# Altium PCB kijek3.PcbDoc
Units mm, origin at the board's own origin, x right, y up, seen from the top; angles counter-clockwise.
Board outline 85 x 21 mm, 2 copper layers (Top Layer, Bottom Layer); 73 components, 60 nets, 285 pads, 82 vias.
Unrouted connection lines stored in the file: 1.
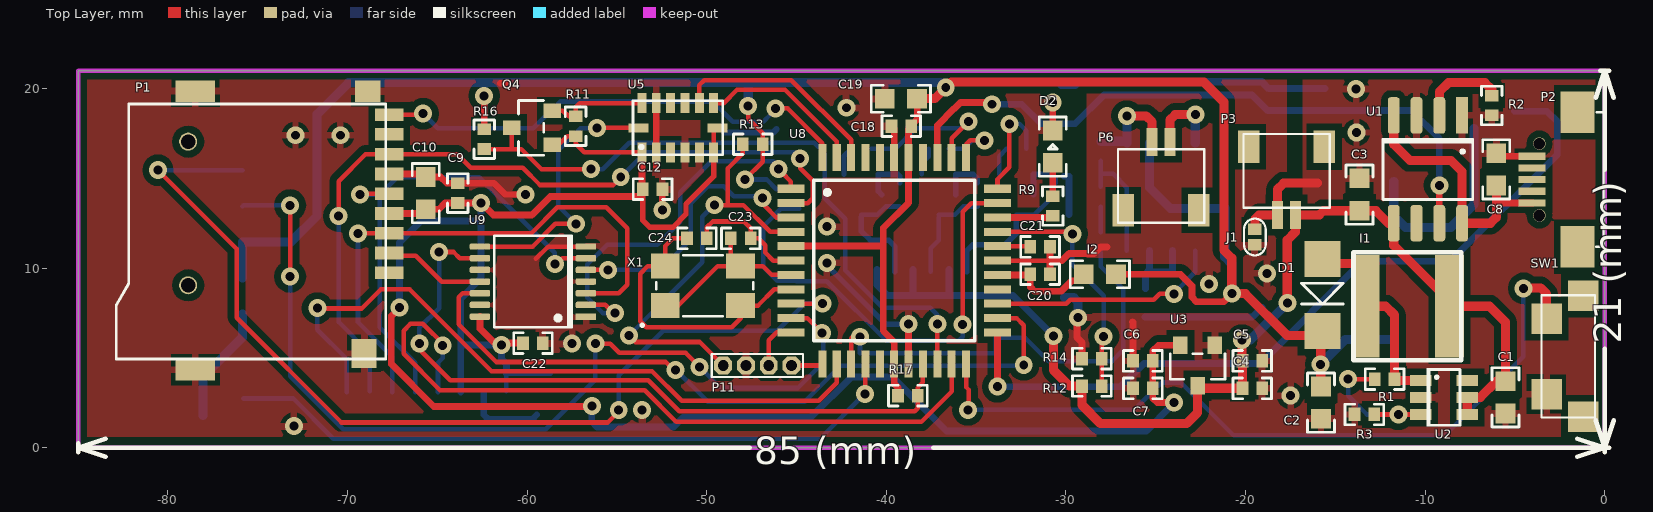
[diagram p0: Top Layer view]
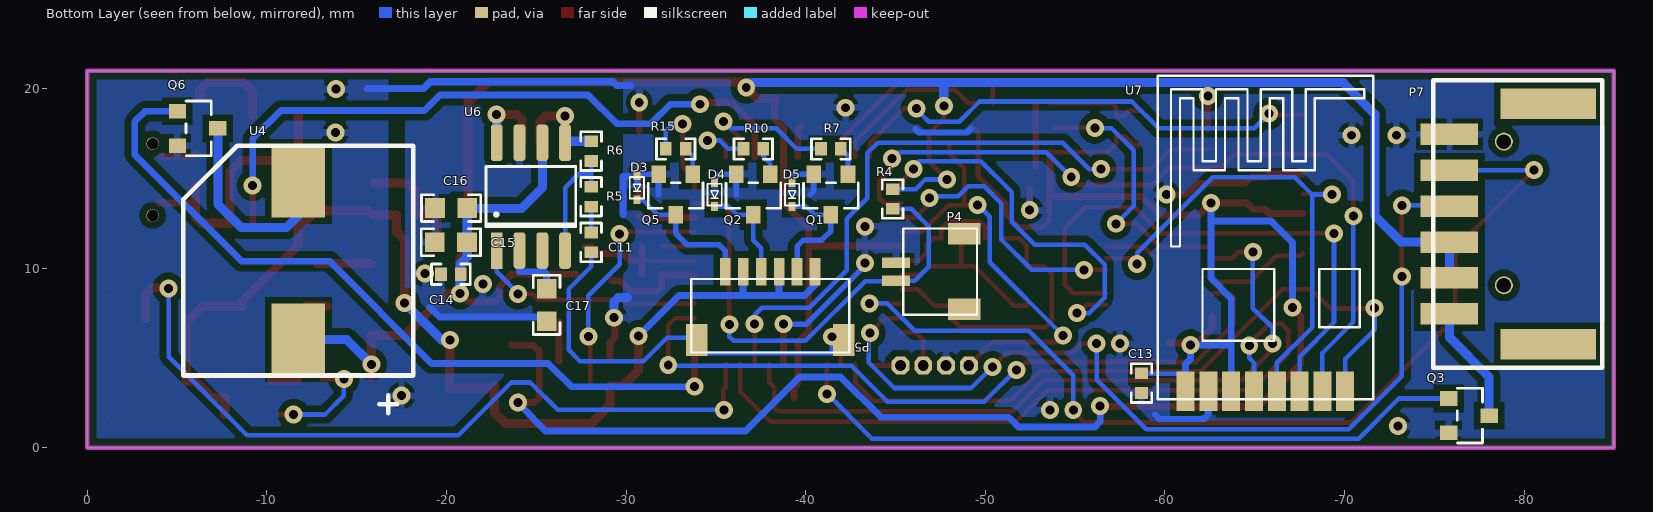
[diagram p1: Bottom Layer view, seen from below]

## Layer stack, top to bottom
Top Layer: signal copper 0.0356
Dielectric: dielectric 0.32, FR-4, Dk 4.8
Bottom Layer: signal copper 0.0356

## Board outline
-85,0 -85,21 0,21 0,0

## Design rules (kind name [scope] priority, off if disabled: settings)
Clearance [All] p1: gap=0.254
MinimumSolderMaskSliver [All] p1: minsoldermaskwidth=0.025
PlaneConnect [All] p1: planeconnectstyle=Relief reliefexpansion=0.508 reliefentries=4 reliefconductorwidth=0.381 reliefairgap=0.254
PolygonConnect [All] p1: connectstyle=Relief reliefconductorwidth=0.381 reliefentries=4 polygonreliefangle="90 Angle" airgapwidth=0.254
RoutingVias [All] p1: holewidth=0.5 width=1 viastyle="Through Hole" minholewidth=0.5 minwidth=1 maxholewidth=0.711 maxwidth=1.27
SolderMaskExpansion [All] p1: expansion=0.127
Width [All] p1: maxlimit=0.508 minlimit=0.254 preferedwidth=0.254
26 further rules are at their usual default settings.

## Components (designator, comment, footprint, x,y, rotation, side; value= is the part's Value field where it differs from the comment)
C1 "22uF" C0603 -5.526,2.802 r270 top
C2 "22uF" C0603 -15.799,2.515 r270 top
C3 "4,7uF" C0603 -13.654,14.1 r90 top
C4 "1uF" C0402 -19.623,3.31 r0 top
C5 "100nF" C0402 -19.623,4.834 r0 top
C6 "100nF" C0402 -25.719,4.834 r180 top
C7 "1uF" C0402 -25.719,3.31 r180 top
C8 "4,7uF" C0603 -6.034,15.502 r90 top
C9 "100nF" C0402 -63.866,14.178 r90 top
C10 "10uF" C0603 -65.644,14.178 r90 top
C11 "470nF" C0402 -28.056,11.438 r90 bottom
C12 "100nF" C0402 -53.01,14.402 r0 top
C13 "100nF" C0402 -58.7,3.6 r270 bottom
C14 "100nF" C0402 -20.247,9.66 r0 bottom
C15 "10uF" C0603 -20.247,11.438 r0 bottom
C16 "10uF" C0603 -20.258,13.343 r0 bottom
C17 "4,7uF" C0603 -25.578,7.95 r270 bottom
C18 "100nF" C0402 -39.167,17.907 r180 top
C19 "4,7uF" C0603 -39.192,19.431 r180 top
C20 "100nF" C0402 -31.434,9.66 r180 top
C21 "100nF" C0402 -31.434,11.184 r0 top
C22 "100nF" C0402 -59.677,5.824 r0 top
C23 "22pF" C0402 -48.108,11.659 r180 top
C24 "22pF" C0402 -50.546,11.659 r0 top
D1 "SS34" SMA -15.723,8.509 r90 top
D2 "BLUE" LED0603 -30.734,16.764 r270 top
D3 "RB521S30T1G" SOD523 -30.607,14.478 r90 bottom
D4 "RB521S30T1G" SOD523 -34.925,14.097 r90 bottom
D5 "RB521S30T1G" SOD523 -39.243,14.097 r90 bottom
I1 "22uH" 6x6x2.8mm -10.987,7.882 r180 top
I2 "10uH" I0603 -28.107,9.66 r180 top
J1 "SOLDER_JUMPER" SOLDER_JUMPER -19.482,11.735 r270 top
P1 "MICROSD" MICROSD -67.676,8.644 r0 top
P2 "USB" MICRO_USB_2 -1.513,11.184 r90 top
P3 "A1001WR-S-2P" A1001WR-S-2P -17.718,14.867 r180 top
P4 "LIGHT" A1001WR-S-2P -46.939,9.804 r90 bottom
P5 "MOTORS" A1001WR-S-6P -38.024,7.899 r180 bottom
P6 "A1001WR-S-2P" A1001WR-S-2P -24.703,15.121 r0 top
P7 "CON" MX-502352-0600 -78.598,12.454 r90 bottom
P11 "DEBUG" PAD_4-1 -47.182,4.58 r0 top
Q1 "BC847B" SOT23 -41.402,14.097 r0 bottom
Q2 "BC847B" SOT23 -37.084,14.097 r0 bottom
Q3 "2N7002" SOT23 -76.93,1.786 r270 bottom
Q4 "2N7002" SOT23 -59.723,17.815 r90 top
Q5 "BC847B" SOT23 -32.766,14.097 r0 bottom
Q6 "2N7002" SOT23 -6.147,17.78 r270 bottom
R1 "1M1" R0402 -12.257,3.818 r180 top
R2 "1K2" R0402 -6.288,19.058 r90 top
R3 "150K" R0402 -13.386,1.854 r180 top
R4 "4K7" R0402 -44.845,13.851 r90 bottom
R5 "20K" R0402 -28.056,13.978 r90 bottom
R6 "20K" R0402 -28.056,16.518 r90 bottom
R7 "10K" R0402 -41.402,16.637 r0 bottom
R9 "1K2" R0402 -30.734,13.462 r270 top
R10 "10K" R0402 -37.084,16.637 r0 bottom
R11 "4K7" R0402 -57.3,17.9 r90 top
R12 "1M1" R0402 -28.555,3.437 r180 top
R13 "4K7" R0402 -47.436,16.899 r180 top
R14 "1M1" R0402 -28.555,4.961 r180 top
R15 "10K" R0402 -32.766,16.637 r0 bottom
R16 "4K7" R0402 -62.39,17.18 r270 top
R17 "4K7" R0402 -38.8,2.9 r0 top
SW1 "SW_3x6x3.5mm" 3x6x3.5mm -2.224,5.088 r270 top
U1 "TP4056" SO-8 -9.844,15.502 r270 top
U2 "MT3608" SOT-23-6 -8.955,2.802 r270 top
U3 "XC6206" SOT23 -22.671,4.58 r180 top
U4 "SMB07" SMB07 -11.749,10.422 r90 bottom
U5 "ADXL345" LGA_CC-14 -51.611,17.815 r90 top
U6 "LM4871" SO-8 -24.703,13.978 r90 bottom
U7 "NRF24L01" NRF24L01 -65.597,3.158 r90 bottom
U8 "ATmega644" TQFP-44A -39.562,10.422 r0 top
U9 "74LCV125" TSSOP-14 -59.677,9.253 r180 top
X1 "18,432MHz" CFPX-104 -50.216,9.017 r0 top

## Footprints (in the part's own frame and the unit in brackets; to place one, negate y for a bottom-side part, rotate by r counter-clockwise, add the part's x,y. Pads: shape width x height; smd on the part's side, far side on the other; paste and mask are expansions set on the pad)
3x6x3.5mm [mm]
  rect 1.7x1.7 smd: 1(-2.1,-1.016) 2(2.1,-1.016) 3(3.37,1.016) 4(-3.37,1.016)
  Top Layer lines w0.127: 3.4,1.016 3.37,1.016 ; -3.37,1.016 -3.4,1.016
  silkscreen extent -3.4,-1.3 3.4,1.68, body extent -3.9,-1.1 3.9,2.5, height 3.5
6x6x2.8mm [mm]
  rect 1.6x5.7 smd: 1(-2.35,0) 2(2.35,0)
  silkscreen extent -3,-3 3,3, body extent -3,-3 3,3, height 2.8
A1001WR-S-2P [mm]
  rect 0.6x1.55 smd: 1(-0.5,1.9) 2(0.5,1.9)
  rect 1.2x1.8 smd: 3(-2.1,-1.9) 3(2.1,-1.9)
  silkscreen extent -2.4,-2.6 2.4,1.5, body extent -2.46,-2.66 2.46,1.56, height 2.9
A1001WR-S-6P [mm]
  rect 1.2x1.8 smd: 0(-4.1,-1.9) 0(4.1,-1.9)
  rect 0.6x1.55 smd: 1(-2.5,1.9) 2(-1.5,1.9) 3(-0.5,1.9) 4(0.5,1.9) 5(1.5,1.9) 6(2.5,1.9)
  silkscreen extent -4.4,-2.6 4.4,1.5, body extent -4.46,-2.66 4.4,1.56, height 2.9
C0402 [mm] "Chip Resistor, Body 1.0x0.5mm, IPC Low Density"
  rect 0.65x0.75 smd: 1(-0.55,0) 2(0.55,0)
  silkscreen extent -1.07,-0.58 1.07,0.58, body extent -0.52,-0.28 0.53,0.28, height 0.4
C0603 [mm] "Chip Resistor, Body 1.6x0.8mm, IPC Low Density"
  rect 1.1x1.1 smd: 1(-0.9,0) 2(0.9,0)
  silkscreen extent -1.65,-0.75 1.65,0.75, body extent -0.85,-0.47 0.85,0.47, height 0.6
CFPX-104 [mm]
  rect 1.6x1.4 smd: 1(-2.1,-1.1) 1(2.1,1.1) 2(-2.1,1.1) 2(2.1,-1.1)
  silkscreen extent -3.45,-2.28 2.8,1.7, body extent -2.5,-1.6 2.5,1.6, height 1
I0603 [mm] "Chip Resistor, Body 1.6x0.8mm, IPC Low Density"
  rect 1.1x1.1 smd: 1(-0.9,0) 2(0.9,0)
  silkscreen extent -1.65,-0.75 1.65,0.75, body extent -0.85,-0.47 0.85,0.47, height 0.6
LED0603 [mm] "Chip Diode Led, Body 1.6x0.8mm, IPC Low Density"
  rect 1.1x1.1 smd: 1(-0.9,0) 2(0.9,0)
  silkscreen extent -1.65,-0.75 1.65,0.75, body extent -0.85,-0.47 0.85,0.47, height 0.6
LGA_CC-14 [mm]
  rect 1.118x0.5 smd mask+0.025: 1(-1.371,2) 2(-1.371,1.2) 3(-1.371,0.4) 4(-1.371,-0.4) 5(-1.371,-1.2) 6(-1.371,-2) 8(1.371,-2) 9(1.371,-1.2) 10(1.371,-0.4) 11(1.371,0.4) 12(1.371,1.2) 13(1.371,2)
  rect 0.5x1.118 smd mask+0.025: 7(0,-2.2) 14(0,2.2)
  silkscreen extent -1.5,-2.5 1.5,2.5, body extent -1.58,-2.58 1.58,2.58, height 1
MICRO_USB_2 [mm]
  rect 2.3x1.9 smd: 0(0,0) 0(7.5,0)
  rect 0.4x1.5 smd: 1(2.45,2.525) 2(3.1,2.525) 3(3.75,2.525) 4(4.4,2.525) 5(5.05,2.525)
  round 0.7 hole 0.65: 6(1.75,2.125) 7(5.75,2.125)
  silkscreen extent 0,-1.45 7.5,-1.02, body extent -0.29,-2.73 7.79,2.83, height 2.77
MICROSD [mm]
  rect 1.6x0.7 smd: 1(0,1.1) 2(0,2.2) 3(0,3.3) 4(0,4.4) 5(0,5.5) 6(0,6.6) 7(0,7.7) 8(0,8.8) 9(0,9.9)
  rect 2.2x1.2 smd: 10(-10.8,-4.3) 10(-10.8,11.2)
  rect 1.4x1.6 smd: 10(-1.4,-3.4)
  rect 1.4x1.2 smd: 10(-1.2,11.2)
  round 1 hole 0.8: 14(-11.2,0.4) 14(-11.2,8.4)
  silkscreen extent -15.2,-3.7 -0.2,10.5, body extent -15.2,-3.7 -0.2,10.5, height 1.7
MX-502352-0600 [mm]
  rect 1.7x5.3 smd: 0(-6.7,-2.75) 0(6.7,-2.75)
  rect 1.2x3.2 smd: 1(5,2.75) 2(3,2.75) 3(1,2.75) 4(-1,2.75) 5(-3,2.75) 6(-5,2.75)
  silkscreen extent -8,-5.75 8,3.65, body extent -8.13,-5.88 8.13,3.78, height 6.4
NRF24L01 [mm]
  rect 2.2x1 smd: 1(0,4.445) 2(0,3.175) 3(0,1.905) 4(0,0.635) 5(0,-0.635) 6(0,-1.905) 7(0,-3.175) 8(0,-4.445)
  silkscreen extent -0.45,-6 17.55,6, body extent -0.53,-6.08 17.63,6.08, height 1.85
PAD_4-1 [mm]
  oct 1x1 hole 0.6: 1(-1.905,0) 2(-0.635,0) 3(0.635,0) 4(1.905,0)
  silkscreen extent -2.54,-0.64 2.54,0.64
R0402 [mm] "Chip Resistor, Body 1.0x0.5mm, IPC Low Density"
  rect 0.65x0.75 smd: 1(-0.55,0) 2(0.55,0)
  silkscreen extent -1.07,-0.58 1.07,0.58, body extent -0.52,-0.28 0.53,0.28, height 0.4
SMA [mil]
  rect 79x79 smd: 1(-78.87,0) 2(78.87,0)
  silkscreen extent -20,-46 26,46, body extent -98,-53 98,53, height 87
SMB07 [mm]
  rect 4x3 smd: 1(-4.4,0) 2(4.4,0)
  silkscreen extent -8.5,-6.4 6.4,6.4, body extent -6.4,-6.4 6.4,6.4, height 6.5
SO-8 [mil]
  rect 80x26 smd: 1(-118.11,75)
  rrect50% 80x26 smd: 2(-118.11,25) 3(-118.11,-25) 4(-118.11,-75) 5(118.11,-75) 6(118.11,-25) 7(118.11,25) 8(118.11,75)
  silkscreen extent -66,-98 66,98, body extent -121,-96 121,96, height 68
SOD523 [mm]
  rect 0.48x0.4 smd: 1(-0.663,0) 2(0.663,0)
  silkscreen extent -0.6,-0.4 0.6,0.4, body extent -0.8,-0.4 0.8,0.4, height 0.7
SOLDER_JUMPER [mm]
  rect 0.65x0.75 smd: 1(-0.425,0)
  rrect0% 0.65x0.75 smd: 2(0.425,0)
  silkscreen extent -1.03,-0.6 1.03,0.6
SOT23 [mil]
  rect 32x38 smd: 1(-37.6,-44.33) 2(37.6,-44.33) 3(0,44.33)
  silkscreen extent -60,-26 60,30, body extent -57,-49 57,48, height 40
SOT-23-6 [mm]
  rect 0.6x1.2 smd: 1(-0.95,-1.3) 2(0,-1.3) 3(0.95,-1.3) 4(0.95,1.3) 5(0,1.3) 6(-0.95,1.3)
  silkscreen extent -1.63,-0.98 1.62,0.9, body extent -1.5,-1.5 1.5,1.5, height 1.3
TQFP-44A [mm] "QFP; 44 Leads; Body 10 x 10 mm; Pitch 0.8 mm"
  rect 1.5x0.45 smd: 1(-5.75,4) 2(-5.75,3.2) 3(-5.75,2.4) 4(-5.75,1.6) 5(-5.75,0.8) 6(-5.75,0) 7(-5.75,-0.8) 8(-5.75,-1.6) 9(-5.75,-2.4) 10(-5.75,-3.2) 11(-5.75,-4) 23(5.75,-4) 24(5.75,-3.2) 25(5.75,-2.4) 26(5.75,-1.6) 27(5.75,-0.8) 28(5.75,0) 29(5.75,0.8) 30(5.75,1.6) 31(5.75,2.4) 32(5.75,3.2) 33(5.75,4)
  rect 0.45x1.5 smd: 12(-4,-5.75) 13(-3.2,-5.75) 14(-2.4,-5.75) 15(-1.6,-5.75) 16(-0.8,-5.75) 17(0,-5.75) 18(0.8,-5.75) 19(1.6,-5.75) 20(2.4,-5.75) 21(3.2,-5.75) 22(4,-5.75) 34(4,5.75) 35(3.2,5.75) 36(2.4,5.75) 37(1.6,5.75) 38(0.8,5.75) 39(0,5.75) 40(-0.8,5.75) 41(-1.6,5.75) 42(-2.4,5.75) 43(-3.2,5.75) 44(-4,5.75)
  silkscreen extent -4.47,-4.47 4.48,4.48, body extent -6,-6 6,6, height 1.1
TSSOP-14 [mil]
  rect 45x14 smd: 1(-116.14,76.77)
  rrect50% 45x14 smd: 2(-116.14,51.18) 3(-116.14,25.59) 4(-116.14,0) 5(-116.14,-25.59) 6(-116.14,-51.18) 7(-116.14,-76.77) 8(116.14,-76.77) 9(116.14,-51.18) 10(116.14,-25.59) 11(116.14,0) 12(116.14,25.59) 13(116.14,51.18) 14(116.14,76.77)
  silkscreen extent -87,-100 85,100, body extent -126,-100 126,100, height 47

## Part data
C1 C2 C3 C4 C5 C6 C7 C8 C9 C10 C11 C12 C13 C14 C15 C16 C17 C18 C19 C20 C21 C22 C23 C24: library part Cap, "Capacitor"
D1: library part Diode
D2: library part LED_BLUE, "LED"
D3 D4 D5: library part "Diode Shottky"
I1 I2: library part Inductor
J1 P3 P6: "Header, 2-Pin"
P2: library part USB_2.0
P4: library part A1001WR-S-2P, "Header, 2-Pin"
P5 P7: library part "Header 6", "Header, 6-Pin"
P11: library part "Header 4", "Header, 4-Pin"
Q1 Q2 Q5: library part BC847C(BEC), "NPN"
Q3 Q4 Q6: library part 2N7002(GSD), "N-MOSFET"
R1 R2 R3 R4 R5 R6 R7 R9 R10 R11 R12 R13 R14 R15 R16 R17: library part Res, "Resistor"
U4: library part BUZ_SMB07
U8: "TQFP - 44pin / MLF - 44pin"
U9: "BUFFERS (3-STATE)"
X1: library part Crystal

## Via types
v1: diameter 1, hole 0.5, Top Layer to Bottom Layer, 82 vias

## Nets (pads, with @x,y where several pads share a name; then routed paths per layer and width w, separated by ;. In a path a pad name is that pad's centre, name@x,y a point inside that pad or via, vN(x,y) a via of type N, cw(c..) or ccw(c..) an arc to the next point about the centre after c; other vN are vias at no path point)
3V3: C6.1 C7.1 C9.1 C10.1 C12.1 C13.1 C22.1 P1.4 Q4.1 R11.1 U3.2 U5.1 U5.6 U5.7 U7.1 U7.3 U9.14 | length 120.8
  Top Layer w0.254: Q4.1 -58.265,16.86 -57.775,17.35 -57.302,17.35 -57.302,16.918 -56.828,16.444 U5.1 ; U5.6 -49.611,17.615 U5.7
  Top Layer w0.305: C12.1 -53.56,12.666 -53.162,12.268 -51.892,12.268 -51.156,13.005 -51.156,13.564 -49.611,15.108 U5.6
  Top Layer w0.381: P1.4 -65.8,13.044 -65.566,13.278 -64.922,13.278 -64.572,13.628 C9.1 v1(-62.56,13.628) -61.886,12.954 -59.741,12.954 -58.712,13.983 -53.624,13.983 ; v1(-67.1,7.8) -67.564,7.336 -67.564,4.664 -65.2,2.3 -56.383,2.3 v1(-56.4,2.318) ; U9.14 -62.627,6.627 -61.824,5.824 C22.1 ; C12.1@-53.611,14.402 U5.1 ; v1(-23.992,2.523) -24.915,2.523 -25.169,2.777 C7.1 C6.1 -25.169,5.384 -24.847,5.706 U3.2
  Bottom Layer w0.254: U7.1 -61.152,4.123 C13.1@-58.7,4.123
  Bottom Layer w0.381: v1(-67.1,7.8) -67.1,11.437 -65.913,12.624 -62.56,12.624 ; U7.3@-63.695,3.1 -63.695,5.723 ; v1(-62.56,13.628) -62.56,12.624 ; U7.1@-61.152,4.123 -61.152,4.656 -61.427,4.931 v1(-61.427,5.724) -63.694,5.724 -63.695,5.723 ; v1(-56.4,2.318) -56.4,1.454 -56.102,1.155 -51.853,1.155 -51.308,1.7 -44.195,1.7 -41.95,3.945 -39.661,3.945 -36.656,0.94 -25.524,0.94 v1@-24.144,2.319 ; -63.695,5.723 -63.695,8.314 -62.56,9.449 -62.56,12.624
5V: C2.1 C14.1 C15.1 C16.1 C18.1 C19.1 D1.1 I2.1 P7.4 P7.5 R4.2 R13.1 R16.1 R17.1 U4.1 U6.6 U8.5 U8.17 U8.38 | length 144.8
  Top Layer w0.254: v1(-47.879,14.935) -46.886,15.928 R13.1 -46.886,17.517 -47.69,18.321 -47.69,19.083 -47.701,19.072 v1(-47.701,19.025)
  Top Layer w0.381: R16.1 v1(-62.39,19.593) ; U8.5 -45.303,11.232 -40.181,11.232 -40.172,11.222 ; R17.1@-39.35,2.802 -39.35,3.352 -39.562,3.564 U8.17 -39.562,5.901 -40.172,6.51 -40.172,11.222 ; C19.1@-38.281,19.439 -38.281,18.265 -38.762,17.784 U8.38 -38.762,13.64 -40.172,12.23 -40.172,11.222 ; I2.1 -23.63,9.66 -22.987,9.017 -22.987,8.382 -22.733,8.128 -21.217,8.128 v1(-20.766,8.579)
  Top Layer w0.508: C19.1@-38.281,19.439 -37.301,19.439 v1(-36.692,20.049) -36.378,20.363 -22.319,20.363 -21.209,19.253 -21.209,10.998 -20.766,10.555 v1(-20.766,8.579) -20.009,8.579 -17.69,6.26 D1.1@-15.813,6.26 ; v1(-15.824,4.648) -15.621,4.648 -15.596,4.674 -15.748,4.826 v1@-15.813,4.826 ; C2.1@-15.813,3.956 v1@-15.813,4.826 ; D1.1@-15.813,5.879 v1@-15.813,4.826
  Bottom Layer w0.254: v1(-47.879,14.935) -46.665,14.935 -46.13,14.401 R4.2
  Bottom Layer w0.381: v1(-62.39,19.593) -62.39,20.303
  Bottom Layer w0.508: P7.5 P7.4 -73.153,11.454 -71.693,12.914 -71.693,18.575 -69.94,20.328 -47.715,20.328 ; v1(-47.701,19.025) -47.69,19.036 -47.69,20.303 -47.715,20.328 ; v1(-36.692,20.049) -36.971,20.328 -47.715,20.328 ; U6.6 -25.338,14.486 -24.184,13.332 C16.1@-21.158,13.332 ; C16.1 C16.1@-21.158,13.332 ; v1(-20.766,8.579) -20.766,10.233 -21.158,10.625 C16.1@-21.158,13.332 ; v1(-15.824,4.648) -14.45,6.022 U4.1
AGND: C14.2 C15.2 C16.2 C17.2 C20.1 C21.2 J1.2 U6.7 U8.28 | length 14.7
  Top Layer w0.254: U8.28 -30.884,10.422
  Top Layer w0.381: C20.1 -30.884,10.422 ; C21.2 -30.884,10.422 ; -27.711,11.184 -28.067,11.184 -28.431,10.82 -29.82,10.82 -30.218,10.422 -30.884,10.422
  Bottom Layer w0.381: C17.2@-25.603,7.279 -19.623,7.279 -19.075,7.826
  other v1: -22.022,9.119 -18.81,9.711
BAT: C1.1 C3.1 C4.1 C5.1 I1.1 P3.1 P5.2 P5.4 P5.6 R12.2 U1.5 U2.4 U2.5 U3.3 | length 63.8
  Top Layer w0.508: v1(-30.7,6.231) -30.7,4.329 -29.808,3.437 R12.2 -29.105,2.378 -28.073,1.346 -23.289,1.346 -22.671,1.964 U3.3 ; U3.3@-22.527,3.31 C4.1 C5.1 -20.2,4.861 v1(-20.2,6) ; v1@-17.78,7.95 v1(-17.675,8.055) -17.675,11.56 -17.218,12.017 P3.1 -15.884,12.967 -15.652,13.2 C3.1 -12.74,13.2 -12.042,12.502 U1.5 -11.749,11.266 -8.637,8.154 I1.1 -6.415,7.882 -5.526,6.993 C1.1 -6.023,3.702 -6.923,2.802 U2.5 U2.4
  Bottom Layer w0.381: P5.6@-40.513,9.934 -40.513,9.061 -39.935,8.484 -36.513,8.484 ; -38.513,8.652 P5.4@-38.513,9.934 ; P5.2@-36.513,9.934 -36.513,8.484 ; v1(-30.7,6.231) -32.952,8.484 -36.513,8.484
  Bottom Layer w0.508: v1(-20.2,6) -19.73,6 v1(-17.675,8.055)
GND: C1.2 C2.2 C3.2 C4.2 C5.2 C6.2 C7.2 C8.2 C9.2 C10.2 C12.2 C13.2 C18.2 C19.2 C22.2 C23.1 C24.2 D2.1 D3.2 D4.2 D5.2 J1.1 P1.6 P1.10 P2.5 P3.2 P4.2 P7.1 P11.2 Q1.2 Q2.2 Q3.2 Q5.2 Q6.2 R2.1 R3.2 R14.2 SW1.2 U1.1 U1.3 U2.2 U3.1 U5.2 U5.4 U5.5 U5.12 U7.2 U8.6 U8.18 U8.39 U9.1 U9.4 U9.7 U9.10 U9.13 | length 82.4
  Top Layer w0.254: -59.512,10.516 -58.825,11.203 U9.7 ; C24.2 -49.996,12.275 -49.673,12.598 -47.939,12.598 -47.558,12.217 C23.1 -47.117,11.659 -46.736,11.278 -46.736,10.871 -46.287,10.422 U8.6
  Top Layer w0.356: C9.2 -61.845,14.728 -61.217,14.1 v1(-60.1,14.1) ; -61.499,20.295 -61.214,20.295 ; -52.811,15.676 U5.2 U5.12
  Top Layer w0.381: P1.6 -65.81,15.244 C10.2 -64.811,15.078 -64.461,14.728 C9.2 ; v1(-52.476,13.233) v1@-52.476,13.307 ; C12.2 -52.476,14.385 v1@-52.476,13.307 ; v1@-52.389,13.219 v1@-52.476,13.307 ; U8.6 U8.6@-45.034,10.422 ; C18.2@-39.731,17.915 -39.562,17.746 U8.39 ; U8.18 v1(-38.762,6.879) ; D2.1 v1(-30.734,19.228) ; R14.2 -29.105,5.864 -29.388,6.147 -29.388,6.858 v1@-29.007,7.239 ; -26.289,7.01 -26.269,6.99 C6.2 ; C8.2 -5.866,16.234 P2.5
  Top Layer w0.508: J1.1 -19.482,12.725 -19.24,12.967 P3.2 -18.218,14.396 -17.882,14.732 -16.002,14.732
  Bottom Layer w0.305: v1(-43.307,10.287) -43.307,10.142 -40.044,6.879 v1(-38.762,6.879) ; -40.259,14.097 -40.447,14.285 Q1.2 -39.353,15.223 -39.243,15.113 D5.2 ; -36.129,14.097 Q2.2 -35.162,15.223 -34.925,14.986 D4.2 ; Q5.2 -30.844,15.223 -30.607,14.986 -30.607,14.76
  Bottom Layer w0.33: -31.811,14.097 Q5.2
  Bottom Layer w0.356: U7.2 -62.422,1.843 -62.179,1.6 -59.69,1.6 -59.461,1.829 ; -49.2,17.755 -48.997,17.551 -46.304,17.551 -46.114,17.742
  Bottom Layer w0.381: -30.099,15.113 -29.836,15.113 -29.836,12.984
  Bottom Layer w0.406: -30.277,20.168 -29.464,20.168 -29.261,20.371 -19.099,20.371 -18.726,19.998 -15.57,19.998
  Bottom Layer w0.508: -30.074,8.357 -29.566,8.357 -29.337,8.128 v1(-29.337,7.239)
  other v1: -72.988,1.202 -53.6,2.1 -17.5,2.9 -57.5,5.8 -43.307,12.319 -72.9,17.4 -70.4,17.4 -13.818,17.551 -42.229,18.931 -13.843,19.964
NetC8_1: C8.1 P2.1 U1.4 U1.8 | length 14.8
  Top Layer w0.381: -5.997,13.634 P2.1@-3.987,13.634
  Top Layer w0.508: U1.4 -11.749,16.899 -10.852,16.002 -8.566,16.002 -7.939,15.375 -7.939,14.74 U1.8 -6.367,12.502 -6.034,12.835 -6.034,13.597 ; C8.1 -6.034,13.597 ; -5.997,13.634 -6.034,13.597
NetC11_1: C11.1 P5.0 U8.14 | length 25.5
  Top Layer w0.254: U8.14 -41.962,6.092 -41.654,6.4 v1@-41.195,6.4
  Bottom Layer w0.254: v1(-41.467,6.18) -41.467,5.266 -33.923,5.266 -33.913,5.276 -33.913,6.134 -32.277,6.134 -30.969,4.826 -27.432,4.826 -26.8,5.458 -26.8,8.836 -28.056,10.092 C11.1
NetC11_2: C11.2 R5.1 | length 1.4
  Bottom Layer w0.254: C11.2 R5.1
NetC17_1: C17.1 U6.2 U6.3 | length 4.6
  Bottom Layer w0.381: C17.1 -25.578,9.677 -25.338,9.917 U6.3 ; -25.224,9.803 -24.068,9.803 U6.2
NetC20_2: C20.2 I2.2 U8.27 | length 5.6
  Top Layer w0.381: U8.27 C20.2@-32.022,9.622 ; C20.2 -31.984,8.94 -31.757,8.713 -30.276,8.713 -29.693,9.296 I2.2@-29.213,9.296
NetC21_1: C21.1 U8.29 | length 1.8
  Top Layer w0.254: U8.29 C21.1@-32.022,11.222
NetC23_2: C23.2 U8.7 X1.1 | length 9.5
  Top Layer w0.254: X1.1@-52.33,8.052 X1.1@-52.316,8.052 ; X1.1@-52.316,7.917 -51.583,7.917 -49.383,10.117 -48.116,10.117 -46.877,10.117 -46.382,9.622 U8.7 ; C23.2 -48.658,10.269 X1.1@-48.641,10.252
NetC24_1: C24.1 U8.8 X1.2 | length 16.5
  Top Layer w0.254: C24.1 -51.892,11.659 -52.316,11.235 -52.316,10.117 -53.281,10.117 -53.7,9.698 -53.7,7.043 -53.366,6.709 -48.612,6.709 -48.13,7.191 -48.13,7.205 ; -48.116,7.205 -48.116,7.917 -47.147,7.917 -46.242,8.822 U8.8
NetD1_2: D1.2 I1.2 R1.1 U2.1 | length 9.9
  Top Layer w0.508: D1.2@-15.813,10.266 -12.879,10.266 cw(c-12.879,7.726) I1.2@-12.791,10.265 ; I1.2 -12.2,7.882 -11.707,7.389 R1.1 -11.641,3.752 U2.1
NetD2_2: D2.2 R9.1 | length 1.9
  Top Layer w0.381: R9.1 D2.2
NetD3_1: D3.1 P5.1 Q5.3 | length 7.7
  Bottom Layer w0.254: Q5.3 -31.758,12.971 -30.914,13.815 D3.1
  Bottom Layer w0.305: P5.1 -35.524,10.958 -35.179,11.303 -33.401,11.303 -32.766,11.938 Q5.3@-32.766,12.844
NetD4_1: D4.1 P5.3 Q2.3 | length 5.6
  Bottom Layer w0.254: P5.3 -37.524,11.117 -37.084,11.557 Q2.3@-37.084,12.844 ; Q2.3 -36.178,12.971 -35.715,13.434 D4.1
NetD5_1: D5.1 P5.5 Q1.3 | length 6.8
  Bottom Layer w0.254: Q1.3 -40.496,12.971 -40.033,13.434 D5.1
  Bottom Layer w0.305: Q1.3@-41.402,12.844 -41.402,12.065 -40.894,11.557 -39.878,11.557 -39.524,11.203 P5.5
NetP1_2: P1.2 U9.11 | length 5.7
  Top Layer w0.254: P1.2 -67.532,10.7 -66.2,10.7 -64.753,9.253 U9.11
NetP1_3: P1.3 U7.6 U9.3 | length 31.3
  Top Layer w0.254: v1@-69.344,11.944 P1.3 -59.76,11.944 -58.318,13.386 -55.588,13.386 -54.432,12.23 -54.432,9.068 -54.897,8.603 U9.3
  Bottom Layer w0.254: v1(-69.418,11.938) -69.418,6.985 -67.505,5.072 U7.6@-67.505,3.1
NetP1_5: P1.5 U7.5 U9.6 | length 28.8
  Top Layer w0.254: v1(-69.3,14.1) -69.256,14.144 P1.5 ; v1@-58.3,10.3 -58.047,10.553 U9.6
  Bottom Layer w0.254: v1(-69.3,14.1) -68.196,14.1 -67.234,15.062 -62.662,15.062 -58.46,10.86 v1(-58.46,10.219) ; -68.199,14.1 -68.199,6.699 -66.235,4.735 U7.5@-66.235,3.1
NetP1_7: P1.7 U7.7 U8.2 | length 44.7
  Top Layer w0.254: v1(-70.5,12.9) -70.5,14.844 -69,16.344 P1.7 -63.893,16.344 -63.144,15.596 -60.249,15.596 -59.284,14.63 -55.195,14.63 -54.763,15.063 v1(-54.788,15.088) ; U8.2 -44.378,13.622 -44.1,13.9 -44.1,14.865 -44.8,15.565 v1(-44.8,16.1)
  Bottom Layer w0.254: v1(-70.5,12.9) -70.5,7 -68.775,5.275 U7.7@-68.775,3.158 ; v1@-54.6,14.9 -54.6,15.25 -53.391,16.459 -45.159,16.459 -45,16.3 -45.2,16.1 v1(-44.8,16.1)
NetP1_9: P1.9 U8.44 | length 28.2
  Top Layer w0.254: P1.9 -65.844,18.544 v1(-65.788,18.6) ; v1(-46.166,18.88) -46.369,18.88 -46.389,18.9 -45.5,18.9 -43.562,16.962 U8.44
  Bottom Layer w0.254: v1(-65.788,18.6) -64.968,17.78 -59.665,17.78 -58.166,19.279 -49.679,19.279 -48.544,18.144 -46.856,18.144 -46.42,18.58 -46.42,18.931 -46.369,18.88 v1(-46.166,18.88)
NetP4_1: P4.1 R4.1 U8.32 | length 26.7
  Top Layer w0.254: v1(-35.752,6.866) -35.752,13.14 -35.27,13.622 U8.32
  Bottom Layer w0.254: R4.1 -45.881,13.301 -46.863,12.319 -46.863,10.084 -46.084,9.304 P4.1 -45.014,9.279 -43.315,9.279 -39.988,5.952 -35.981,5.952 -35.752,6.18 v1(-35.752,6.866)
NetP6_1: P6.1 R6.2 U6.5 | length 5.6
  Top Layer w0.508: v1(-26.608,18.474) -25.535,18.474 -25.203,18.142 P6.1
  Bottom Layer w0.508: R6.2 -26.698,17.068 U6.5 v1(-26.608,18.474)
NetP6_2: P6.2 U6.8 | length 4.8
  Top Layer w0.508: P6.2 -24.203,18.266 -23.919,18.55 v1(-22.798,18.55)
  Bottom Layer w0.508: U6.8 -22.798,18.804 v1(-22.798,18.55)
NetP7_2: P7.2 U8.9 | length 56.1
  Top Layer w0.254: v1(-80.555,15.454) -80.558,15.451 -76.175,11.068 -76.175,7.244 -70.336,1.405 -55.513,1.405 -55.009,1.909 -55.2,2.1 v1(-54.9,2.1) ; U8.9 v1@-43.664,8.022
  Bottom Layer w0.254: v1(-80.555,15.454) P7.2 ; v1(-54.9,2.1) -55.2,2.1 -54.9,2.4 -54.9,4.028 -52.418,6.51 -46.068,6.51 -44.544,8.034 v1(-43.55,8.034)
NetP7_3: P7.3 U8.10 | length 51.6
  Top Layer w0.254: v1(-73.2,9.528) v1(-73.2,13.5) ; v1(-56.2,5.8) -55.381,5.8 -54.862,5.281 -51.181,5.281 v1(-50.4,4.5) ; U8.10 -44.414,7.222 v1(-43.575,6.383)
  Bottom Layer w0.254: P7.3 -75.802,13.5 v1(-73.2,13.5) ; v1(-73.2,9.528) -73.2,3.979 -70.245,1.024 -58.968,1.024 -56.2,3.792 v1@-56.2,5.4 ; v1(-50.4,4.5) -49.227,3.327 -44.929,3.327 -43.524,4.732 v1@-43.524,6.764
NetP7_6: P7.6 Q3.3 | length 6.6
  Bottom Layer w0.508: Q3.3 -78.056,3.935 -75.848,6.143 P7.6
NetP11_1: P11.1 R13.2 U8.4 | length 23.8
  Top Layer w0.254: v1(-54.331,6.248) -53.972,5.89 -50.397,5.89 P11.1 ; v1(-49.581,13.513) -47.955,13.513 -46.464,12.022 U8.4 ; -48.819,13.513 -48.819,15.57 -47.986,16.403 R13.2
  Bottom Layer w0.254: v1(-54.331,6.248) -50.241,10.338 -50.241,12.852 v1(-49.581,13.513)
NetP11_3: P11.3 U8.11 | length 2.9
  Top Layer w0.254: P11.3@-46.293,4.58 -46.547,4.834 -46.547,5.977 -46.102,6.422 U8.11
NetP11_4: P11.4 U8.12 | length 1.4
  Top Layer w0.254: P11.4@-45.023,4.58 U8.12@-43.654,4.58
NetQ1_1: Q1.1 R7.1 | length 1.6
  Bottom Layer w0.305: Q1.1 -42.357,16.232 R7.1
NetQ2_1: Q2.1 R10.1 | length 1.6
  Bottom Layer w0.254: Q2.1 -38.039,15.809 -37.634,16.214 R10.1
NetQ3_1: Q3.1 U8.15 | length 38.5
  Top Layer w0.254: v1@-41.2,2.708 v1(-41.2,3) -41.162,3.038 U8.15
  Bottom Layer w0.254: Q3.1 -73.029,2.741 -70.796,0.508 -43.692,0.508 v1(-41.2,3)
NetQ4_2: Q4.2 R11.2 U5.13 | length 5.7
  Top Layer w0.254: Q4.2 -58.011,18.77 -57.691,18.45 R11.2 -57.3,18.951 -57.065,19.186 U5.13
NetQ4_3: Q4.3 R16.2 U8.20 | length 37.4
  Top Layer w0.254: R16.2 -60.847,16.63 -60.849,16.632 ; Q4.3 -60.849,16.632 ; v1(-56.439,15.519) -56.439,15.5 -59.2,15.5 -60.332,16.632 -60.849,16.632 ; U8.20 v1(-37.162,6.879)
  Bottom Layer w0.254: v1(-56.439,15.519) -56.439,15.5 -55.8,15.5 -54.307,16.993 -44.018,16.993 -43.434,16.408 -43.434,13.894 -42.291,12.751 -42.291,9.881 -40.208,7.798 -37.548,7.798 -37.162,7.412 v1(-37.162,6.879)
NetQ5_1: Q5.1 R15.1 | length 1.6
  Bottom Layer w0.254: Q5.1 -33.721,16.232 R15.1
NetQ6_1: Q6.1 U8.23 | length 44
  Top Layer w0.381: v1(-33.812,3.399) U8.23
  Bottom Layer w0.381: v1(-33.812,3.399) -26.954,3.399 -25.654,4.699 -19.177,4.699 -13.487,10.389 -8.585,10.389 -2.64,16.334 -2.64,18.152 -3.223,18.735 Q6.1
NetQ6_3: Q6.3 U4.2 | length 11.4
  Bottom Layer w0.508: U4.2 -11.749,12.917 -11.1,12.268 -8.56,12.268 -7.273,13.555 Q6.3
NetR1_2: R1.2 R3.1 U2.3 | length 7.3
  Top Layer w0.254: v1@-14.035,3.818 R1.2@-13.061,3.818 ; R3.1@-12.789,1.852 v1(-11.495,1.852) U2.3@-10.636,1.852
  Bottom Layer w0.254: v1(-14.289,3.818) -14.289,2.904 -13.237,1.852 v1(-11.495,1.852)
NetR2_2: R2.2 U1.2 | length 4.9
  Top Layer w0.508: U1.2 -9.209,19.82 -8.701,20.328 -6.669,20.328 -6.288,19.947 R2.2
NetR5_2: R5.2 R6.1 U6.4 | length 6.7
  Bottom Layer w0.254: R5.2 -28.056,15.248 ; R6.1 -28.056,15.248 ; U6.4 -26.608,14.486 -27.37,15.248 -28.056,15.248
NetR7_2: R7.2 U8.35 | length 8.4
  Top Layer w0.254: U8.35 -36.362,17.232 v1(-35.433,18.161)
  Bottom Layer w0.254: R7.2 -39.497,16.637 -38.354,17.78 -35.814,17.78 v1(-35.433,18.161)
NetR9_2: R9.2 U8.31 | length 3.1
  Top Layer w0.381: U8.31 -30.824,12.822 R9.2
NetR10_2: R10.2 U8.34 | length 4.1
  Top Layer w0.254: U8.34 -35.562,16.889 -35.332,17.119 v1(-34.522,17.119)
  Bottom Layer w0.254: R10.2 -35.687,16.637 -35.205,17.119 v1(-34.522,17.119)
NetR12_1: R12.1 R14.1 U8.30 | length 13.4
  Top Layer w0.254: U8.30 v1@-29.675,12.022 ; R12.1 R14.1 -28.005,6.095 v1(-27.9,6.2)
  Bottom Layer w0.254: v1(-29.642,11.913) -29.642,10.211 -27.9,8.469 v1(-27.9,6.2)
NetR15_2: R15.2 U8.33 | length 6
  Top Layer w0.254: U8.33 -33.812,14.956 -33.147,15.621 v1(-33.147,18.034)
  Bottom Layer w0.254: v1(-33.147,18.034) -32.588,18.034 -32.216,17.662 R15.2
NetR17_2: R17.2 U8.19 U9.9 | length 40.1
  Top Layer w0.254: v1(-66,5.8) -66,5.481 -64.276,3.757 -53.257,3.757 -51.532,2.032 -38.418,2.032 -38.25,2.2 R17.2 -38.25,3.352 -37.962,3.64 U8.19 ; v1(-64.9,10.9) -64.1,10.9 -63.753,10.553 U9.9
  Bottom Layer w0.254: v1(-66,5.8) -66,6.672 -64.9,7.772 v1(-64.9,10.9)
NetSW1_1: SW1.1 U8.22 | length 45.3
  Top Layer w0.254: U8.22 -35.562,3.38 -35.4,3.218 -35.4,2.167 v1(-35.458,2.108)
  Top Layer w0.508: v1(-4.51,8.873) -4.483,8.9 -3.572,8.9 -3.24,8.568 SW1.1
  Bottom Layer w0.254: v1(-35.458,2.108) -35.458,2.442 -35.125,2.108 -26.187,2.108 -24.663,3.632 -23.597,3.632 -20.648,0.684 -8.916,0.684 -4.535,5.065 -4.535,9.181 -4.227,8.873 v1(-4.51,8.873)
NetU1_7: U1.7 U8.36 | length 36.5
  Top Layer w0.381: U8.36 -37.162,17.956 -36.22,18.898 -36.212,18.898 -35.935,19.175 ; -35.861,19.233 -34.219,19.233 v1(-34.112,19.126) ; U1.7 v1(-9.209,14.613)
  Bottom Layer w0.381: v1(-34.112,19.126) -32.468,19.126 -31.383,18.042 -29.481,18.042 -27.889,19.634 -19.634,19.634 -18.779,18.779 -10.779,18.779 -9.209,17.209 -9.209,15.121
NetU5_8: U5.8 U8.43 | length 9.2
  Top Layer w0.254: U5.8 -49.062,19.186 -48.315,19.933 -45.644,19.933 -42.762,17.051 U8.43
NetU5_9: U5.9 U8.42 | length 11.9
  Top Layer w0.254: U5.9 -50.411,20.195 -50.139,20.467 -45.289,20.467 -41.962,17.14 U8.42
NetU5_14: U5.14 U9.8 | length 15.4
  Top Layer w0.254: U9.8 -59.695,11.203 -58.426,12.471 v1(-57.277,12.471) ; v1(-56.1,17.8) -56.085,17.815 U5.14
  Bottom Layer w0.254: v1(-57.277,12.471) -58.268,13.462 -58.268,16.561 -57.028,17.8 v1(-56.1,17.8)
NetU6_1: U6.1 U8.25 | length 13.1
  Top Layer w0.254: U8.25 -33.805,8.015 -29.987,8.015 -29.755,8.247 -25.103,8.247 -24.782,8.568 v1(-23.992,8.568)
  Bottom Layer w0.254: v1@-24.093,8.5 -22.798,9.794 U6.1
NetU7_4: U7.4 U8.21 | length 41.3
  Top Layer w0.254: v1@-64.601,5.7 -65.809,6.908 -66.498,6.908 -66.881,6.525 -66.881,5.229 -64.852,3.2 -53.454,3.2 -51.691,1.437 -38.06,1.437 -36.362,3.135 U8.21
  Bottom Layer w0.254: U7.4@-64.965,3.1 -64.965,4.733 -64.7,4.997 v1(-64.7,5.7)
NetU7_8: U7.8 U8.13 | length 39.1
  Top Layer w0.254: v1(-71.679,7.772) -71.661,7.755 -69.209,7.755 -68.15,8.814 -66.532,8.814 -61.983,4.265 -53.047,4.265 -51.398,2.616 -43.761,2.616 -42.762,3.615 U8.13
  Bottom Layer w0.254: v1(-71.679,7.772) -71.456,7.772 -71.439,7.755 -71.679,7.515 -71.679,6.579 -70.045,4.945 U7.8@-70.045,3.1
NetU8_1: U8.1 U9.2 | length 21.2
  Top Layer w0.254: U9.2 -55.653,7.953 v1@-55.1,7.4 ; v1(-46.001,15.528) -45.805,15.331 -45.805,15.305 -45.312,14.812 U8.1
  Bottom Layer w0.254: v1(-55.1,7.5) -55.8,7.5 -56.642,8.342 -56.642,10.211 -55.55,11.303 -52.756,11.303 -51.468,12.59 -51.468,14.238 -49.755,15.951 -46.285,15.951 -46.001,15.668 v1(-46.001,15.528)
NetU8_3: U8.3 U9.5 | length 15.7
  Top Layer w0.254: U9.5 v1(-55.503,9.903) ; v1@-46.8,13.984 -46.8,13.5 -46.122,12.822 U8.3
  Bottom Layer w0.254: v1(-55.503,9.903) -52.581,9.903 -50.902,11.582 -50.902,13.589 -49.936,14.554 -49.047,14.554 -48.493,14 -46.816,14 -46.838,13.978 -46.953,13.978 -46.903,13.927 v1(-46.903,13.902)
NetU8_24: U8.24 U9.12 | length 41.1
  Top Layer w0.254: U9.12 -63.597,8.603 -63.819,8.381 -63.819,6.87 -61.722,4.773 -52.273,4.773 v1@-51.7,4.2 ; U8.24 -32.749,7.222 -32.348,6.821 v1(-32.348,4.605)
  Bottom Layer w0.254: v1@-52,4.4 -51.777,4.4 -49.951,2.573 -44.54,2.573 -42.559,4.555 -32.399,4.555 v1(-32.348,4.605)
  other v1: -51.729,4.326
pads on no net: P1.1 P1.8 P1.14 P2.0 P2.2 P2.3 P2.4 P2.6 P2.7 P3.3 P4.3 P6.3 P7.0 SW1.3 SW1.4 U1.6 U2.6 U5.3 U5.10 U5.11 U8.16 U8.26 U8.37 U8.40 U8.41

## Polygon pours and split planes (outlines as drawn)
AGND on Top Layer "AGND_TOP" (solid, remove dead copper, pour order 8): -17.704,20.98 -17.704,7.442 -28.88,7.442 -28.829,7.442 -28.829,21.006 -17.729,21.006
GND on Top Layer "GND_TOP" (solid, remove dead copper, pour order 6): -85.044,22.491 -29.889,22.491 -29.889,7.497 -23.793,7.497 -16.808,7.497 -16.808,9.878 -16.808,22.491 -0.044,22.491 -0.044,0.619 -85.044,0.619 -85.044,22.491
AGND on Bottom Layer "AGND_BOTTOM" (solid, remove dead copper, pour order 7): -17.704,20.98 -17.704,7.442 -28.88,7.442 -28.829,7.442 -28.829,21.006 -17.729,21.006
GND on Bottom Layer "GND_BOTTOM" (solid, remove dead copper, pour order 5): -85,21 -29.845,21 -29.845,6.604 -23.749,6.604 -16.764,6.604 -16.764,8.89 -16.764,21 0,21 0,0 -85,0 -85,21

## Keep-outs
Keep-Out Layer:
  lines w0.254: -60,0 0,0 ; 0,0 0,21 -85,21 -85,0 0,0

## Silkscreen, mask and mechanical layers (free items; w line width, h text height)
Top Overlay:
  lines w0.254: -85,-0.254 -85,0.254 ; -83.476,-0.508 -85,0 ; -83.476,0.508 -85,0 ; -47.604,0 -85,0 ; -37.396,0 0,0 ; -1.524,-0.508 0,0 ; -1.524,0.508 0,0 ; -0.508,1.524 0,0 ; -0.508,19.476 0,21 ; -0.254,0 0.254,0 ; -0.254,21 0.254,21 ; 0,-0.254 0,0.254 ; 0,5.523 0,0 ; 0,15.477 0,21 ; 0.508,1.524 0,0 ; 0.508,19.476 0,21
  text "21 (mm)" at 0.914,5.777 h1.52 r90
  text "85 (mm)" at -47.35,-0.914 h1.52